# Altium PCB nanoboard.PcbDoc
Units mm, origin at the board's own origin, x right, y up, seen from the top; angles counter-clockwise.
Board outline 33.66 x 34.93 mm, 2 copper layers (Top Layer, Bottom Layer); 12 components, 35 nets, 74 pads, 0 vias.
Unrouted connection lines stored in the file: 34.
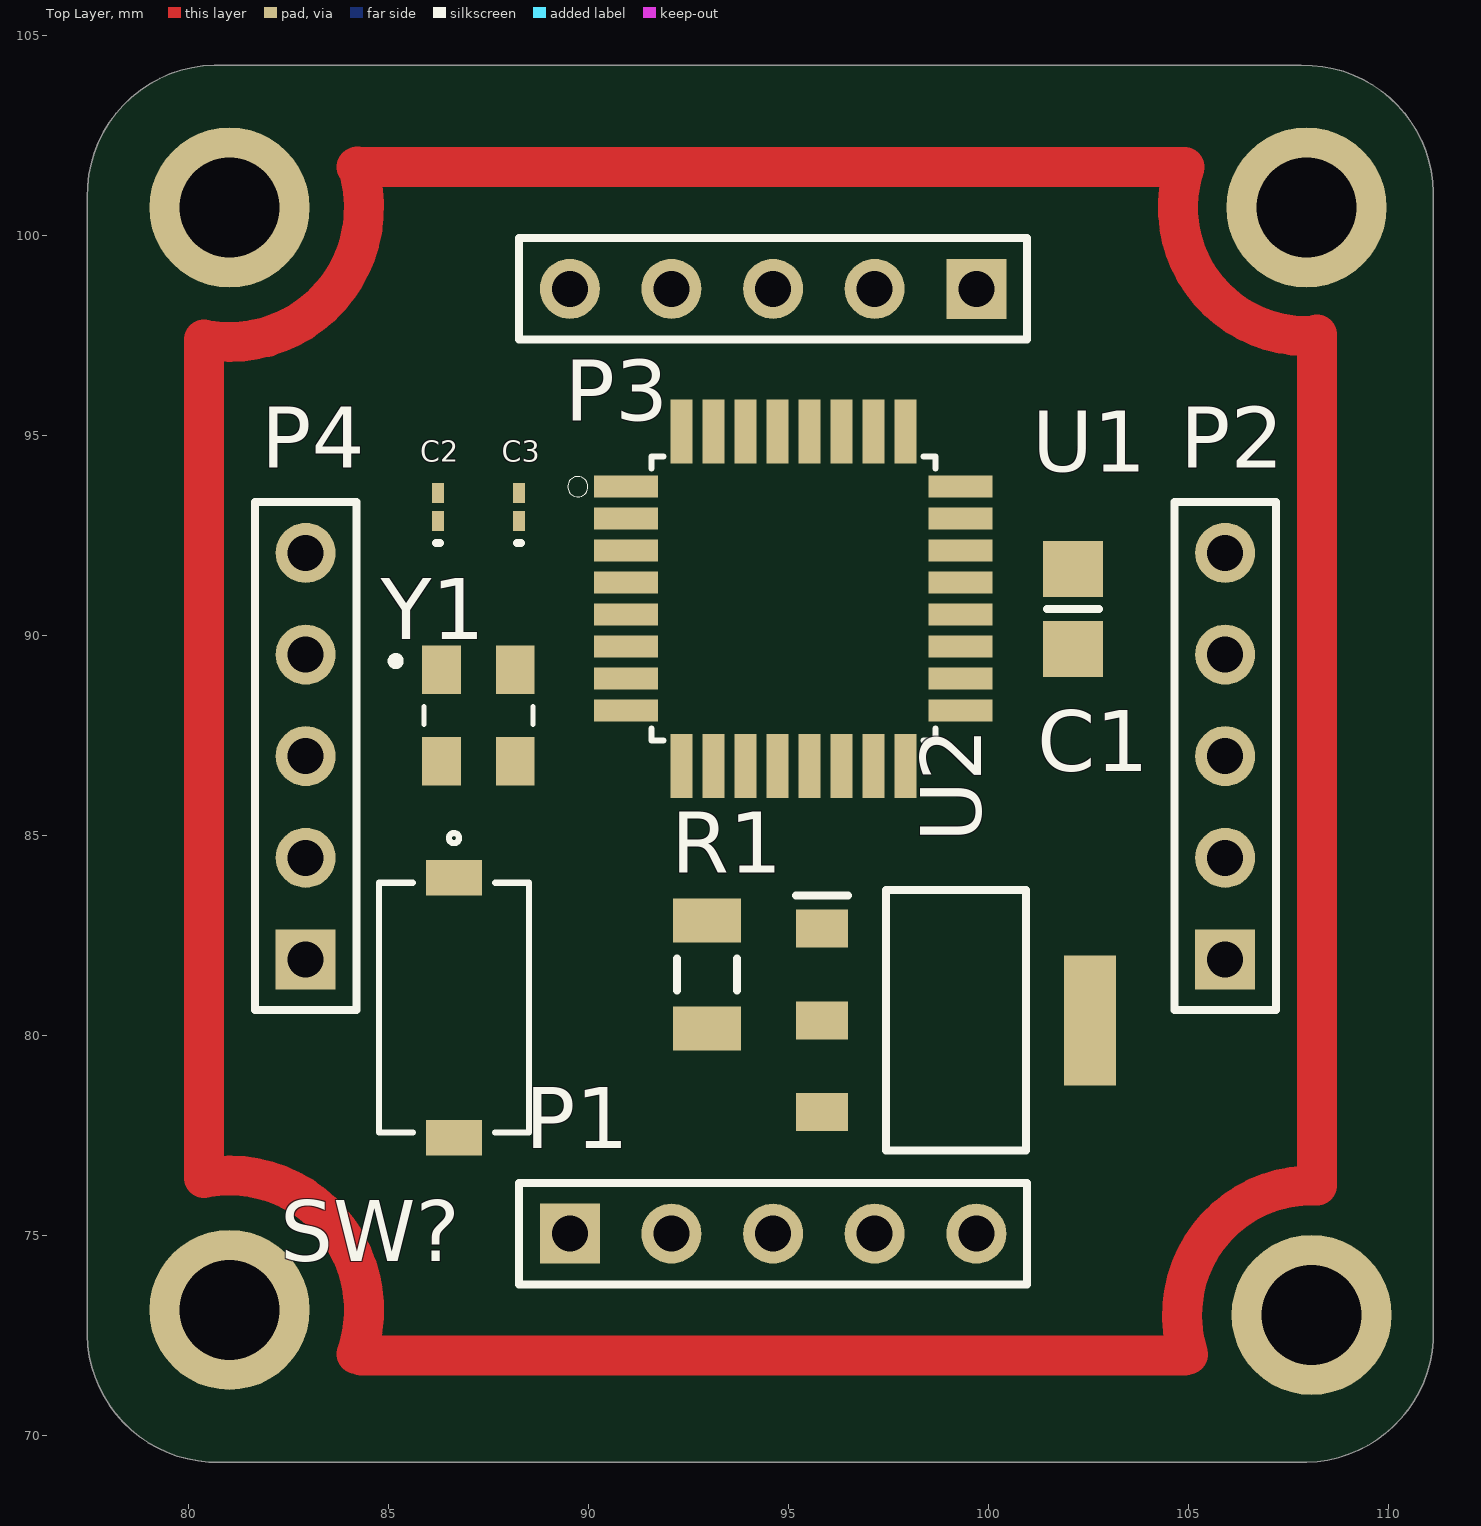
[diagram p0: Top Layer view]
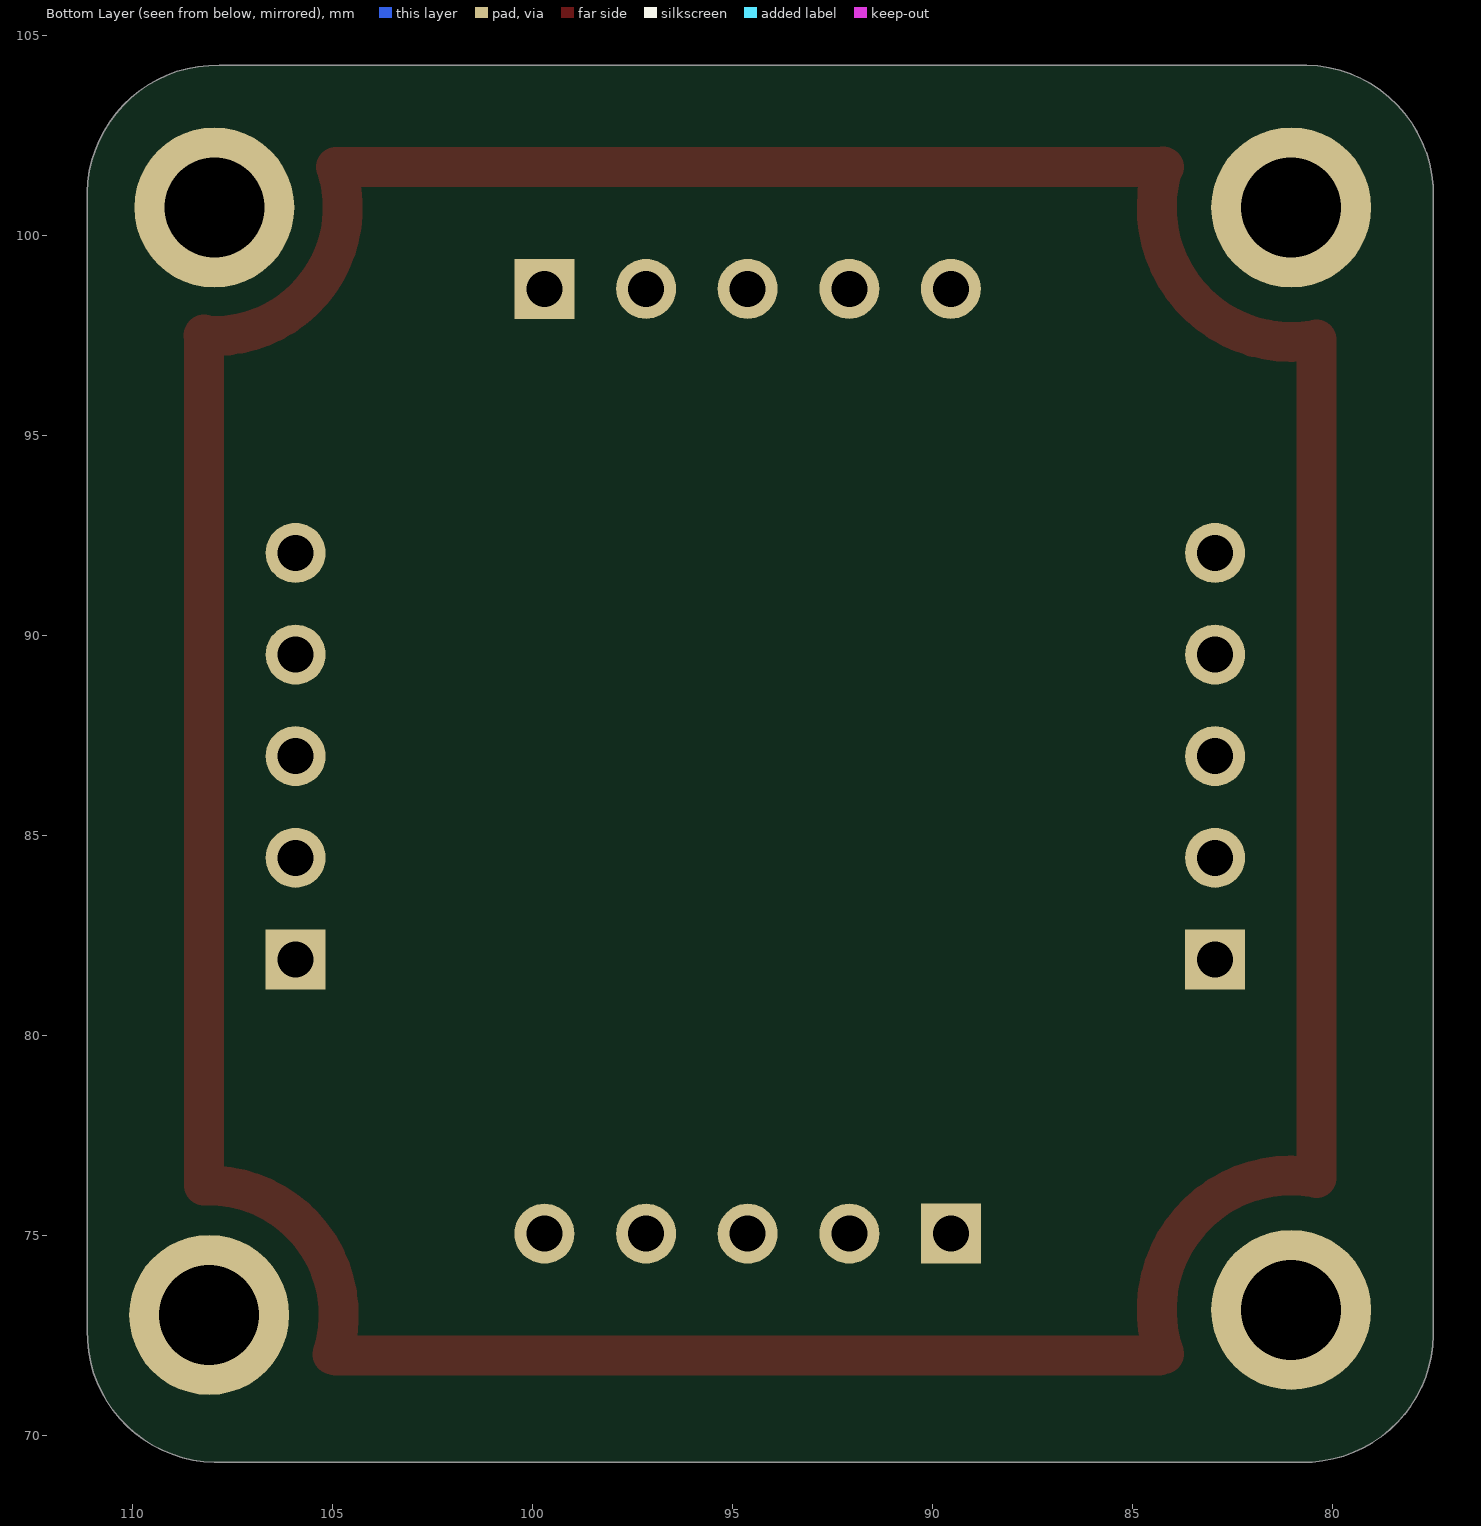
[diagram p1: Bottom Layer view, seen from below]

## Layer stack, top to bottom
Top Solder: solder mask 0.0102, Solder Resist, Dk 3.5
Top Layer: signal copper 0.0356
Dielectric 1: dielectric 0.32, FR-4, Dk 4.8
Bottom Layer: signal copper 0.0356
Bottom Solder: solder mask 0.0102, Solder Resist, Dk 3.5

## Board outline
77.47,72.517 77.47,100.965 cw(c80.708,101.028) 80.645,104.267 107.823,104.267 cw(c107.887,101.029) 111.125,101.092 111.125,72.644 cw(c107.887,72.58) 107.95,69.342 80.772,69.342 cw(c80.709,72.58)

## Design rules (kind name [scope] priority, off if disabled: settings)
Clearance [All] p1: gap=0.254 ignorepadtopadclearanceinfootprint=FALSE except(0: Arc-Hole Track-Hole SMDPad-Hole THPad-Hole Via-Hole Fill-Hole Poly-Hole Region-Hole Text-Hole; 0.1: Arc-SMDPad Track-SMDPad SMDPad-SMDPad)
PolygonConnect [All] p1: connectstyle=Relief reliefconductorwidth=0.254 reliefentries=4 polygonreliefangle="90 Angle" airgapwidth=0.254
RoomDefinition nanoboard [InComponentClass('nanoboard')] p1: confinementstyle=ConfineIn formatcopy=TRUE lockcomponents=FALSE outline 78.613,70.739 110.363,70.739 110.363,103.124 78.613,103.124
RoutingVias [All] p1: holewidth=0.711 width=1.27 viastyle="Through Hole" minholewidth=0.711 minwidth=1.27 maxholewidth=0.711 maxwidth=1.27
SolderMaskExpansion [All] p1: expansion=0.102 istentingtop=FALSE
Width Width_1 [All] p1: maxlimit=3 minlimit=0.154 preferedwidth=0.454 bottomlayer_minwidth=0.254 bottomlayer_prefwidth=0.254 minimp=50.000000 maximp=50.000000 favimp=50.000000
30 further rules are at their usual default settings.

## Components (designator, comment, footprint, x,y, rotation, side; value= is the part's Value field where it differs from the comment)
C1 "Cap" 6-0805_M 102.108,90.678 r270 top value=100nF
C2 "Cap" 0603 86.233,93.218 r90 top value=15pF
C3 "Cap" 0603 88.265,93.218 r90 top value=15pF
P1 "Header 5" HDR1X5 89.535,75.057 r0 top
P2 "Header 5" HDR1X5 105.918,81.915 r90 top
P3 "Header 5" HDR1X5 99.695,98.679 r180 top
P4 "Header 5" HDR1X5 82.931,81.915 r90 top
R1 "Res1" C1206 92.964,81.534 r90 top value=1K
SW? "" SW_PTS636_CNK 86.638,80.706 r270 top
U1 "ATMEGA328-AU" QFP80P900X900X120-32N 95.123,90.932 r0 top
U2 "AMS1117" SOT229P700X180-4N 99.187,80.391 r0 top
Y1 "16MHz" OSCCC320X250X60N 87.249,88.011 r0 top

## Footprints (in the part's own frame and the unit in brackets; to place one, negate y for a bottom-side part, rotate by r counter-clockwise, add the part's x,y. Pads: shape width x height; smd on the part's side, far side on the other; paste and mask are expansions set on the pad)
6-0805_M [mm] "Chip Resistor, Body 2.0x1.2mm, IPC Low Density"
  rect 1.4x1.5 smd: 1(-1,0) 2(1,0)
  silkscreen extent 0,-0.65 0,0.65, body extent -1.07,-0.7 1.07,0.7, height 0.7
0603 [mm] "Chip Inductor, Body 0.6x0.3mm, IPC High Density"
  rect 0.5x0.3 smd: 1(-0.35,0) 2(0.35,0)
  silkscreen extent -0.9,-0.05 -0.9,0.05, body extent -0.33,-0.18 0.33,0.18, height 0.55
C1206 [mm] "Chip Capacitor, Body 3.2x1.6mm, IPC High Density"
  rect 1.1x1.7 smd: 1(-1.35,0) 2(1.35,0)
  silkscreen extent -0.4,-0.75 0.4,0.75, body extent -1.7,-0.9 1.7,0.9, height 1.3
HDR1X5 [mm] "Connector; Header; 5 Position"
  rect 1.5x1.5 hole 0.9: 1(0,0)
  round 1.5 hole 0.9: 2(2.54,0) 3(5.08,0) 4(7.62,0) 5(10.16,0)
  silkscreen extent -1.27,-1.27 11.43,1.27
OSCCC320X250X60N [mm]
  rect 0.97x1.22 smd: 1(-0.92,1.145) 2(-0.92,-1.145) 3(0.92,-1.145) 4(0.92,1.145)
  silkscreen extent -2.17,-0.22 1.36,1.46
QFP80P900X900X120-32N [mm]
  rect 1.6x0.55 smd: 1(-4.18,2.8) 2(-4.18,2) 3(-4.18,1.2) 4(-4.18,0.4) 5(-4.18,-0.4) 6(-4.18,-1.2) 7(-4.18,-2) 8(-4.18,-2.8) 17(4.18,-2.8) 18(4.18,-2) 19(4.18,-1.2) 20(4.18,-0.4) 21(4.18,0.4) 22(4.18,1.2) 23(4.18,2) 24(4.18,2.8)
  rect 0.55x1.6 smd: 9(-2.8,-4.18) 10(-2,-4.18) 11(-1.2,-4.18) 12(-0.4,-4.18) 13(0.4,-4.18) 14(1.2,-4.18) 15(2,-4.18) 16(2.8,-4.18) 25(2.8,4.18) 26(2,4.18) 27(1.2,4.18) 28(0.4,4.18) 29(-0.4,4.18) 30(-1.2,4.18) 31(-2,4.18) 32(-2.8,4.18)
  silkscreen extent -5.64,-3.55 3.55,3.55, body extent -4.5,-4.5 4.5,4.5, height 1.2
SOT229P700X180-4N [mm]
  rect 1.3x0.95 smd: 1(-3.35,2.29) 2(-3.35,0) 3(-3.35,-2.29)
  rect 1.3x3.25 smd: 4(3.35,0)
  silkscreen extent -4,-3.25 1.75,3.25
SW_PTS636_CNK [mil]
  rect 35x55 smd paste+0 mask+0: 1(-127.95,0) 2(127.95,0)
  silkscreen extent -172,-74 123,74, body extent -118,-69 118,69, height 169

## Part data
C1 C2 C3: "Capacitor", LatestRevisionDate=17-Jul-2002, LatestRevisionNote="Re-released for DXP Platform.", PackageDescription="Radial Cap, Thru-Hole; 2 Leads; 0.3 in Pin Spacing", PackageReference=RAD-0.3, Published=8-Jun-2000, Publisher="Altium Limited"
P1 P2 P3 P4: "Header, 5-Pin", LatestRevisionDate=17-Jul-2002, LatestRevisionNote="Re-released for DXP Platform.", Publisher="Altium Limited"
R1: "Resistor", LatestRevisionDate=17-Jul-2002, LatestRevisionNote="Re-released for DXP Platform.", PackageDescription="Axial Device, Thru-Hole; 2 Leads; 0.3 in Pin Spacing", PackageReference=AXIAL-0.3, Published=8-Jun-2000, Publisher="Altium Limited"
SW?: library part "PTS636 SM50J SMTR LFS", "No Description Available", Mfr_Name="C&K Components", Type="Tactile Switches"
U1: "No Description Available", Mfr_Name=Microchip, RefDes=RefDes, Type=Type
U2: "1117", Manufacturer_Name="Advanced Monolithic Systems", Datasheet Link=https://datasheet.lcsc.com/szlcsc/Advanced-Monolithic-Systems-AMS-AMS1117-ADJ_C6188.pdf, Geometry.Height=1.8mm, Manufacturer_Part_Number=AMS1117
Y1: library part CX3225SB16000D0GZJC1, "Crystal 25.0000mhz 8pf Smd", Package=None, Availability=Unavailable, MP=CX3225SB16000D0GZJC1, Price=None

## Free pads (board coordinates)
  round 4 hole 2.5: H1(81.026,100.711) H2(107.95,100.711) H3(108.077,73.025) H4(81.026,73.152)

## Nets (pads, with @x,y where several pads share a name; then routed paths per layer and width w, separated by ;. In a path a pad name is that pad's centre, name@x,y a point inside that pad or via, vN(x,y) a via of type N, cw(c..) or ccw(c..) an arc to the next point about the centre after c; other vN are vias at no path point)
ADC6: U1.19
ADC7: U1.22
AREF: C1.2 U1.20
GND: C1.1 C2.1 C3.1 SW?.2 U1.3 U1.5 U1.21 U2.1
NetLabel41: P3.5
NetLabel42: P4.1
NetLabel43: P4.2
NetLabel44: P4.3
NetLabel45: P4.4
NetLabel46: P4.5
NetR1_2: R1.2 U1.29
NetY1_2: Y1.2 Y1.4
PB0: P1.1 U1.12
PB1: P1.2 U1.13
PB2: P1.3 U1.14
PB3: P1.4 U1.15
PB4: P1.5 U1.16
PB5: P2.1 U1.17
PB6: C2.2 U1.7 Y1.1
PB7: C3.2 U1.8 Y1.3
PC0: U1.23
PC1: U1.24
PC2: U1.25
PC3: U1.26
PC4: U1.27
PC5: U1.28
PD0: P2.2 U1.30
PD1: P2.3 U1.31
PD2: P2.4 U1.32
PD3: P2.5 U1.1
PD4: P3.1 U1.2
PD5: P3.2 U1.9
PD6: P3.3 U1.10
PD7: P3.4 U1.11
VCC: R1.1 SW?.1 U1.4 U1.6 U1.18 U2.2 U2.4
pads on no net: U2.3
copper on no net: | length 110.1
  Top Layer w1: 84.201,101.727 104.902,101.727 ccw(c107.95,100.711) 108.214,97.509 ; 84.204,72.052 ccw(c81.026,73.152) 80.391,76.454 80.391,97.409 ccw(c81.026,100.711) 84.229,101.736 ; 84.328,72.009 104.902,72.009 ; 104.993,72.038 cw(c108.077,73.025) 108.212,76.26 108.212,97.535

## Silkscreen, mask and mechanical layers (free items; w line width, h text height)
Top Solder:
  lines w0.45: 80.391,76.454 80.391,97.282 ; 84.272,101.75 104.948,101.727 ; 84.328,72.009 105.005,72.009 ; 108.204,76.327 108.204,97.536
  lines w0.454: 80.387,76.473 cw(c81.026,73.152) 84.222,72.046 ; 80.405,97.36 ccw(c81.026,100.711) 84.272,101.75 ; 104.948,101.745 ccw(c107.95,100.711) 108.171,97.544 ; 105.005,72.001 cw(c108.077,73.025) 108.201,76.26
Mechanical 1:
  the board outline again, w0.254